# EAGLE board PCB_Niculae_Karla (EAGLE 9.7.0)
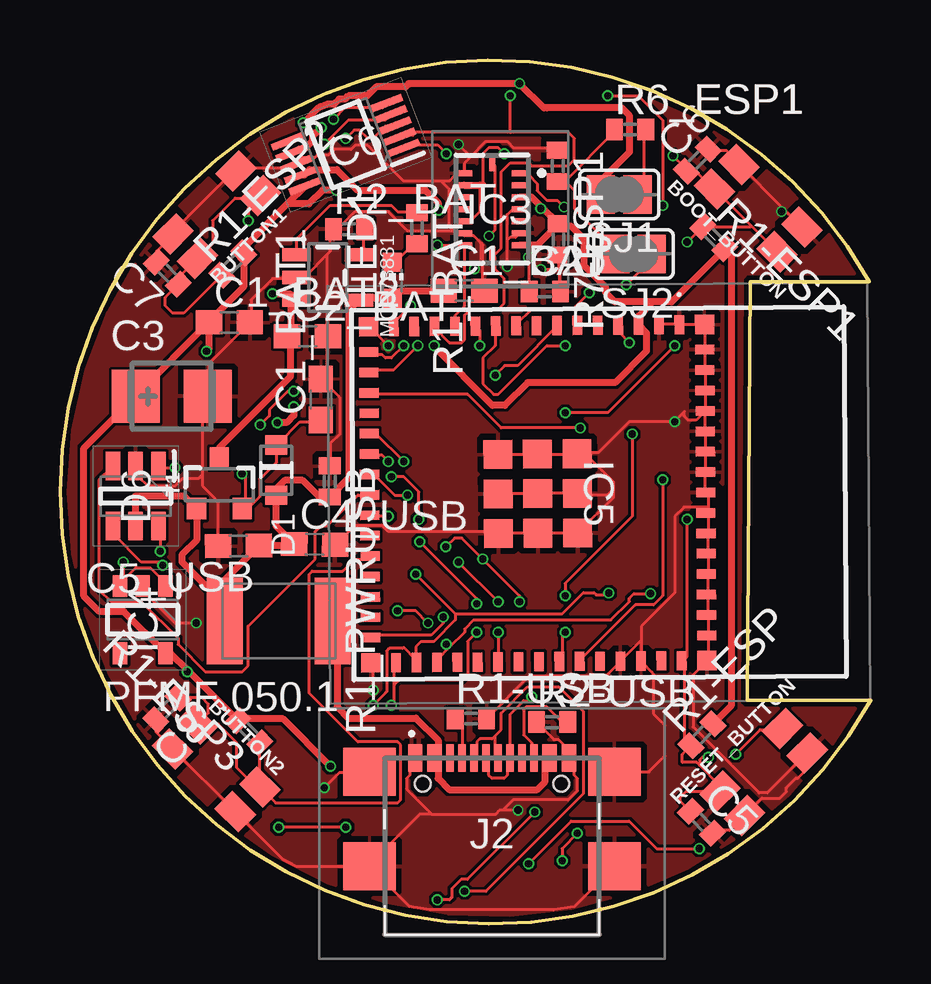
[diagram p0: board, top side]
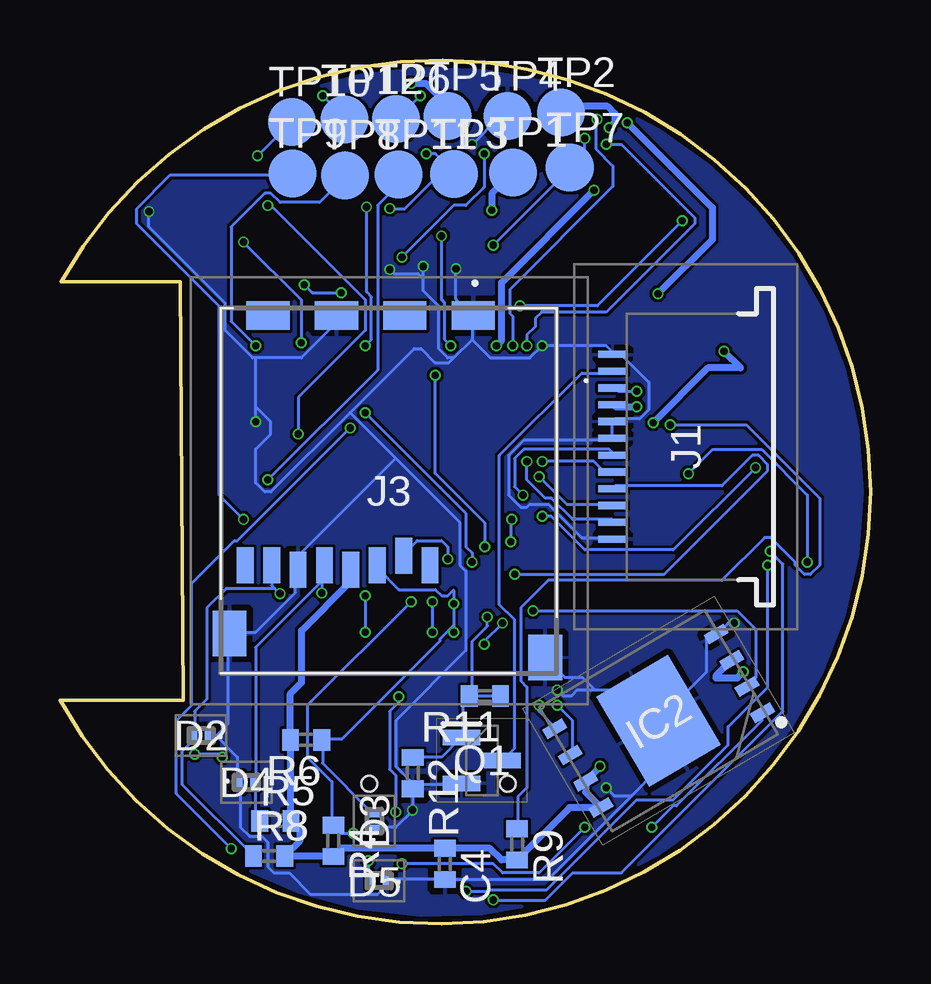
[diagram p1: board, bottom side, seen from below]

Size 33.77 x 36 mm. Coordinates in mm from the lower left corner, seen from the top.
Outline: 0,18 arc151 33.77,9.32 33.65,9.32 28.64,9.32 28.76,26.75 33.73,26.75 arc151 0,18
Copper layers (1*16): Top / Bottom
Stack-up Default Layer Stack: Top User Defined 0.035mm / Dielectric-1 User Defined 1.6mm / Bottom User Defined 0.035mm
Design rules: minimum drill size 0.3mm, minimum copper width 5mil, keepout clearance 0mil, drill distance 6mil, via restrict clearance 0mil, dimension clearance 0.2mm, restrict clearance 0mil, copper clearance wire_polygon to wire_polygon 5mil, copper clearance wire_polygon to pad_smd 5mil, copper clearance wire_polygon to via 5mil, copper clearance pad_smd to pad_smd 5mil, copper clearance pad_smd to via 5mil, copper clearance via to via 5mil, copper clearance smd to pad (same net) 5mil, copper clearance smd to via (same net) 5mil, copper clearance smd to smd (same net) 5mil

## Footprints (pad centres in the part's own frame; a part is rotated, then mirrored left to right if it is on the bottom)
BUTTON = smd 1.4 x 1.05: 1GND -1.85,-0.725; 2GND 1.85,-0.725; 3BUTTON 1.85,0.725; 4BUTTON -1.85,0.725
EAGLE-LTSPICE_C0402 = smd 0.7 x 0.9: 1 -0.65,0; 2 0.65,0
RCL_C0603 = smd 1.1 x 1: 1 -0.85,0; 2 0.85,0
CT3528 = smd 2 x 2.2: + -1.5,0; - 1.5,0
AVX---SD0805S020S1R0_AVX_SD0805S020S1R0_0 = smd 0.8 x 0.9: 1 -1.05,0; 2 1.05,0
PESD5V0S1BL315 = smd 0.4 x 0.7: 1 -0.35,0; 2 0.35,0
SOT95P280X145-6N = smd 1.2 x 0.6: 1 -1.25,0.95; 2 -1.25,0; 3 -1.25,-0.95; 4 1.25,-0.95; 5 1.25,0; 6 1.25,0.95
SON127P800X600X80-9N = smd 0.95 x 0.45: 1 -3.9,1.905; 2 -3.9,0.635; 3 -3.9,-0.635; 4 -3.9,-1.905; 5 3.9,-1.905; 6 3.9,-0.635; 7 3.9,0.635; 8 3.9,1.905 | smd 3.45 x 4.35: 9 0,0
BMI085 = smd 0.675 x 0.25: 1 1.165,1.5; 2 1.165,1; 3 1.165,0.5; 4 1.165,0; 5 1.165,-0.5; 6 1.165,-1; 7 1.165,-1.5; 9 -1.165,-1.5; 10 -1.165,-1; 11 -1.165,-0.5; 12 -1.165,0; 13 -1.165,0.5; 14 -1.165,1; 15 -1.165,1.5 | smd 0.25 x 0.675: 8 0,-1.915; 16 0,1.915
SOT95P280X120-5N = smd 0.9 x 0.6: 1 -1.4,0.95; 2 -1.4,0; 3 -1.4,-0.95; 4 1.4,-0.95; 5 1.4,0.95
ESP32S3MINI1N8 = smd 0.8 x 0.4: 1 -7,5.95; 2 -7,5.1; 3 -7,4.25; 4 -7,3.4; 5 -7,2.55; 6 -7,1.7; 7 -7,0.85; 8 -7,0; 9 -7,-0.85; 10 -7,-1.7; 11 -7,-2.55; 12 -7,-3.4; 13 -7,-4.25; 14 -7,-5.1; 15 -7,-5.95; 31 7,-5.95; 32 7,-5.1; 33 7,-4.25; 34 7,-3.4; 35 7,-2.55; 36 7,-1.7; 37 7,-0.85; 38 7,0; 39 7,0.85; 40 7,1.7; 41 7,2.55; 42 7,3.4; 43 7,4.25; 44 7,5.1; 45 7,5.95 | smd 0.4 x 0.8: 16 -5.95,-7; 17 -5.1,-7; 18 -4.25,-7; 19 -3.4,-7; 20 -2.55,-7; 21 -1.7,-7; 22 -0.85,-7; 23 0,-7; 24 0.85,-7; 25 1.7,-7; 26 2.55,-7; 27 3.4,-7; 28 4.25,-7; 29 5.1,-7; 30 5.95,-7; 46 5.95,7; 47 5.1,7; 48 4.25,7; 49 3.4,7; 50 2.55,7; 51 1.7,7; 52 0.85,7; 53 0,7; 54 -0.85,7; 55 -1.7,7; 56 -2.55,7; 57 -3.4,7; 58 -4.25,7; 59 -5.1,7; 60 -5.95,7 | smd 1.2 x 1.2: 61 0,0; 66 -1.65,1.65; 67 -1.65,0; 68 -1.65,-1.65; 69 0,-1.65; 70 1.65,-1.65; 71 1.65,0; 72 1.65,1.65; 73 0,1.65 | smd 0.8 x 0.8: 62 -7,7; 63 -7,-7; 64 7,-7; 65 7,7
SOP50P490X110-10N = smd 1.4 x 0.3: 1 -2.2,1; 2 -2.2,0.5; 3 -2.2,0; 4 -2.2,-0.5; 5 -2.2,-1; 6 2.2,-1; 7 2.2,-0.5; 8 2.2,0; 9 2.2,0.5; 10 2.2,1
PCA6LA12HL3TR = smd 0.3 x 1.2: 1 -3.85,-3.65; 2 -3.15,-3.65; 3 -2.45,-3.65; 4 -1.75,-3.65; 5 -1.05,-3.65; 6 -0.35,-3.65; 7 0.35,-3.65; 8 1.05,-3.65; 9 1.75,-3.65; 10 2.45,-3.65; 11 3.15,-3.65; 12 3.85,-3.65
USB4110GFA = smd 0.3 x 1.15: A1 -3.35,3.678; A4 -2.55,3.678; A5 -1.25,3.678; A6 -0.25,3.678; A7 0.25,3.678; A8 1.25,3.678; A9 2.55,3.678; A12 3.35,3.678; B1 3.05,3.678; B4 2.25,3.678; B5 1.75,3.678; B6 0.75,3.678; B7 -0.75,3.678; B8 -1.75,3.678; B9 -2.25,3.678; B12 -3.05,3.678 | smd 2.18 x 2: MP1 -5.11,-0.827; MP2 5.11,-0.827; MP3 -5.11,3.103; MP4 5.11,3.103 | hole 0.65: -2.89,2.603; 2.89,2.603
112ATAARR03ATTEND = smd 1.8 x 1.2: G1 10.6,10.4; G2 4.9,10.4; S1 7.75,10.4; S2 2.05,10.4 | smd 1.4 x 1.9: G3 13.6,-3.85; G4 0.45,-2.85 | smd 0.7 x 1.5: P1 8.8,0; P2 7.7,0.4; P3 6.6,0; P4 5.5,-0.2; P5 4.4,0; P6 3.3,-0.2; P7 2.2,0; P8 1.1,0
ADAFRUIT_CHIP-LED0603 = smd 0.8 x 0.8: A 0,-0.75; C 0,0.75
SPARKFUN-IC-POWER_SOT23-5 = smd 0.55 x 1.2: 1 -0.95,-1.3; 2 0,-1.3; 3 0.95,-1.3; 4 0.95,1.3; 5 -0.95,1.3
VARISTOR_CT/CN1812 = smd 1.5 x 3.6: 1 -2.25,0; 2 2.25,0
SOT96P240X120-3N = smd 1.55 x 0.65: 1 -0.85,0.96; 2 -0.85,-0.96; 3 0.85,0
EAGLE-LTSPICE_R0402 = smd 0.7 x 0.9: 1 -0.65,0; 2 0.65,0
SJ = smd 1.168 x 1.6: 1 -0.762,0; 2 0.762,0
SPARKFUN-DISCRETESEMI_SOT23-3 = smd 0.8 x 0.9: 1 -0.95,-1; 2 0.95,-1; 3 0,1.1
TP20R = smd 2 x 2: TP 0,0

## Placement (x,y rotation side)
BOOT_BUTTON  [BUTTON]  29.09,29.83 135 top
BUTTON1  [BUTTON]  6.53,29.55 225 top
BUTTON2  [BUTTON]  6.51,6.5 315 top
C1  1uF  [EAGLE-LTSPICE_C0402]  20.77,28.52 270 top
C1_BAT  4.7uF  [RCL_C0603]  16.84,26.38 0 top
C1_BAT1  4.7uF 0603  [RCL_C0603]  10.87,21.85 90 top
C1_BAT2  4.7uF 0603  [RCL_C0603]  7.05,25.06 0 top
C2  1uF  [EAGLE-LTSPICE_C0402]  20.2,26.36 0 top
C2_BAT  4.7uF  [RCL_C0603]  10.32,24.48 0 top
C3  100uF TANT C  [CT3528]  4.66,21.99 0 top
C4  100nF  [EAGLE-LTSPICE_C0402]  17.74,2.5 270 bottom
C4_USB  100nF  [RCL_C0603]  10.61,15.81 359.2 top
C5  1uF  [EAGLE-LTSPICE_C0402]  26.73,4.24 315 top
C5_USB  4.7uF 0603  [RCL_C0603]  7.44,15.75 180.7 top
C6  100nF  [EAGLE-LTSPICE_C0402]  26.55,31.83 45 top
C7  100nF  [EAGLE-LTSPICE_C0402]  4.47,27.11 135 top
C8  100nF  [EAGLE-LTSPICE_C0402]  4.46,8.96 225 top
D1  AVX---SD0805S020S1R0_AVX_SD0805S020S1R0AVX_SD0805S020S1R0_0_0  [AVX---SD0805S020S1R0_AVX_SD0805S020S1R0_0]  9.01,18.91 270 top
D2  PESD3V3S1BLYL  [PESD5V0S1BL315]  27.89,7.85 180 bottom
D3  PESD3V3S1BLYL  [PESD5V0S1BL315]  20.67,4.29 90 bottom
D4  PESD3V3S1BLYL  [PESD5V0S1BL315]  26,5.9 0 bottom
D5  PESD3V3S1BLYL  [PESD5V0S1BL315]  20.48,1.8 180 bottom
D6  USBLC6-2SC6Y  [SOT95P280X145-6N]  3.15,17.83 270 top
IC2  W25Q256JVEIQ  [SON127P800X600X80-9N]  8.83,8.47 210.4 bottom
IC3  BMI085  [BMI085]  18,29.79 0 top
IC4  XC6220A331MR-G  [SOT95P280X120-5N]  3.45,12.68 270 top
IC5  ESP32-S3-MINI-1-N8  [ESP32S3MINI1N8]  19.9,17.93 270.4 top
IC6  DRV2605LDGST  [SOP50P490X110-10N]  11.9,32.47 201.2 top
J1  PCA-6-LA-12-HL-3-T_R  [PCA6LA12HL3TR]  7.1,19.88 270 bottom
J2  USB4110-GF-A  [USB4110GFA]  18,3.23 0 top
J3  112A-TAAR-R03_ATTEND  [112ATAARR03ATTEND]  27.15,14.95 0 bottom
LED1  [ADAFRUIT_CHIP-LED0603]  13.84,26.82 0 top
MCP73831  SPARKFUN-IC-POWER_MCP73831  [SPARKFUN-IC-POWER_SOT23-5]  11.16,26.94 270 top
PFMF.050.1  500mA  [VARISTOR_CT/CN1812]  9.11,12.62 180 top
Q1  2N7002  [SOT96P240X120-3N]  16.19,6.82 0 bottom
R1-ESP  10K  [EAGLE-LTSPICE_R0402]  26.75,7.88 45 top
R1-ESP1  10K  [EAGLE-LTSPICE_R0402]  27.25,28.6 315 top
R1-ESP2  10K  [EAGLE-LTSPICE_R0402]  7.2,27.5 45 top
R1-ESP3  10K  [EAGLE-LTSPICE_R0402]  7.87,8.01 135 top
R1-USB  5K1  [EAGLE-LTSPICE_R0402]  17.12,8.56 0 top
R1_BAT  200  [EAGLE-LTSPICE_R0402]  14.87,28.99 270 top
R1_PWRUSB  100k  [EAGLE-LTSPICE_R0402]  11.24,18.44 270 top
R2-USB  5K1  [EAGLE-LTSPICE_R0402]  20.5,8.41 0 top
R2_BAT  2K  [EAGLE-LTSPICE_R0402]  12.04,28.95 0 top
R4  10K  [EAGLE-LTSPICE_R0402]  22.38,3.46 270 bottom
R5  10K  [EAGLE-LTSPICE_R0402]  24.79,4.3 0 bottom
R6  10K  [EAGLE-LTSPICE_R0402]  23.52,7.67 180 bottom
R6_ESP1  100K  [EAGLE-LTSPICE_R0402]  23.75,33.1 0 top
R7-ESP1  100K  [EAGLE-LTSPICE_R0402]  20.74,31.58 270 top
R8  10K  [EAGLE-LTSPICE_R0402]  25.06,2.84 0 bottom
R9  22  [EAGLE-LTSPICE_R0402]  14.72,3.32 270 bottom
R11  10K  [EAGLE-LTSPICE_R0402]  16.07,9.5 180 bottom
R12  10K  [EAGLE-LTSPICE_R0402]  19.07,6.29 270 bottom
RESET_BUTTON  [BUTTON]  29.32,6.33 45 top
SJ1  [SJ]  23.3,30.39 180 top
SJ2  [SJ]  23.9,27.92 180 top
T1  20V/4.2A/52mΩ/1.4W  [SPARKFUN-DISCRETESEMI_SOT23-3]  6.64,18.3 0 top
TP1  TPTP20R  [TP20R]  14.9,31.32 0 bottom
TP2  TPTP20R  [TP20R]  12.89,33.8 0 bottom
TP3  TPTP20R  [TP20R]  17.35,31.24 0 bottom
TP4  TPTP20R  [TP20R]  15.12,33.66 0 bottom
TP5  TPTP20R  [TP20R]  17.62,33.66 0 bottom
TP6  TPTP20R  [TP20R]  19.77,33.54 0 bottom
TP7  TPTP20R  [TP20R]  12.53,31.51 0 bottom
TP8  TPTP20R  [TP20R]  21.9,31.19 0 bottom
TP9  TPTP20R  [TP20R]  24.09,31.28 0 bottom
TP10  TPTP20R  [TP20R]  24.1,33.42 0 bottom
TP11  TPTP20R  [TP20R]  19.67,31.23 0 bottom
TP12  TPTP20R  [TP20R]  21.91,33.51 0 bottom

## Library data of the parts
BOOT_BUTTON BUTTON1 BUTTON2 LED1 PFMF.050.1 RESET_BUTTON SJ1 SJ2 TP1-TP12 = Hector_Watch
C1 C2 C4-C8 = Hector_Watch; SPICEMODEL: NONE; SPICEPREFIX: C
C1_BAT C1_BAT1 C1_BAT2 C2_BAT C3 C4_USB C5_USB = Hector_Watch; SPICEPREFIX: C
D1 = Hector_Watch; CENTROID_NOT_SPECIFIED: No; DATASHEET: http://datasheets.avx.com/schottky.pdf; DIGIKEY_DESCRIPTION: DIODE SCHOTTKY 20V 1A 0805; DIGIKEY_PART_NUMBER: 478-7800-1-ND; LEAD_FREE: yes; MF: AVX; MOUSER_PART_NUMBER: 581-SD0805S020S1R0; MPN: SD0805S020S1R0; PACKAGE: 0805 (2012 metric); PREFIX: D; ROHS: yes; TEMPERATURE_RANGE_HIGH: +125°C; TEMPERATURE_RANGE_LOW: -55°C
D2-D5 = Hector_Watch; ARROW_PART_NUMBER: PESD3V3S1BLYL; ARROW_PRICE-STOCK: https://www.arrow.com/en/products/pesd3v3s1blyl/nexperia?region=nac; DESCRIPTION: PESD3V3S1BL - Low capacitance bidirectional ESD protection diode; HEIGHT: 0mm; MANUFACTURER_NAME: Nexperia; MANUFACTURER_PART_NUMBER: PESD3V3S1BLYL; MOUSER_PART_NUMBER: 771-PESD3V3S1BLYL; MOUSER_PRICE-STOCK: https://www.mouser.co.uk/ProductDetail/Nexperia/PESD3V3S1BLYL?qs=vLWxofP3U2zWoKHYJMVoKQ%3D%3D
D6 = Hector_Watch; ARROW_PART_NUMBER: USBLC6-2SC6Y; ARROW_PRICE-STOCK: https://www.arrow.com/en/products/usblc6-2sc6y/stmicroelectronics?region=nac; DESCRIPTION: Low Cap. ESD Protection Auto SOT-23-6 STMicroelectronics USBLC6-2SC6Y, Dual Uni-Directional TVS Diode Array, 6-Pin SOT-23; HEIGHT: 1.45mm; MANUFACTURER_NAME: STMicroelectronics; MANUFACTURER_PART_NUMBER: USBLC6-2SC6Y; MOUSER_PART_NUMBER: 511-USBLC6-2SC6Y; MOUSER_PRICE-STOCK: https://www.mouser.co.uk/ProductDetail/STMicroelectronics/USBLC6-2SC6Y?qs=gNDSiZmRJS%2FOgDexvXkdow%3D%3D
IC2 = Hector_Watch; ARROW_PART_NUMBER: W25Q256JVEIQ; ARROW_PRICE-STOCK: https://www.arrow.com/en/products/w25q256jveiq/winbond-electronics?region=nac; DESCRIPTION: 256M-bit Serial Flash Memory with uniform 4KB sectors and Dual/Quad SPI; HEIGHT: 0.8mm; MANUFACTURER_NAME: Winbond; MANUFACTURER_PART_NUMBER: W25Q256JVEIQ; MOUSER_PART_NUMBER: 454-W25Q256JVEIQ; MOUSER_PRICE-STOCK: https://www.mouser.co.uk/ProductDetail/Winbond/W25Q256JVEIQ?qs=qSfuJ%252Bfl%2Fd4o%2FNFUf7yCgA%3D%3D
IC3 = Hector_Watch; ARROW_PART_NUMBER: BMI085; ARROW_PRICE-STOCK: https://www.arrow.com/en/products/bmi085/bosch; DESCRIPTION: IMUs - Inertial Measurement Units High-performance IMU BMI085 for virtual and augmented reality applications; HEIGHT: 1mm; MANUFACTURER_NAME: BOSCH; MANUFACTURER_PART_NUMBER: BMI085; MOUSER_PART_NUMBER: 262-BMI085; MOUSER_PRICE-STOCK: https://www.mouser.co.uk/ProductDetail/Bosch-Sensortec/BMI085?qs=y6ZabgHbY%252ByGCM8LfWZyqA%3D%3D
IC4 = Hector_Watch; DESCRIPTION: LDO Voltage Regulators; HEIGHT: 1.2mm; MANUFACTURER_NAME: Torex; MANUFACTURER_PART_NUMBER: XC6220A331MR-G; MOUSER_PART_NUMBER: 865-XC6220A331MR-G; MOUSER_PRICE-STOCK: https://www.mouser.co.uk/ProductDetail/Torex-Semiconductor/XC6220A331MR-G?qs=AsjdqWjXhJ8ZSWznL1J0gg%3D%3D
IC5 = Hector_Watch; DESCRIPTION: WiFi Development Tools - 802.11 [Engineering Samples] SMD Module, ESP32-S3FN8, 8 MB SPI Flash, PCB Antenna; HEIGHT: 2.55mm; MANUFACTURER_NAME: Espressif Systems; MANUFACTURER_PART_NUMBER: ESP32-S3-MINI-1-N8; MOUSER_PART_NUMBER: 356-ESP32-S3-MINI1N8; MOUSER_PRICE-STOCK: https://www.mouser.co.uk/ProductDetail/Espressif-Systems/ESP32-S3-MINI-1-N8?qs=XAiT9M5g4x82rl6F%2FIYUQg%3D%3D
IC6 = Hector_Watch; ARROW_PART_NUMBER: DRV2605LDGST; ARROW_PRICE-STOCK: https://www.arrow.com/en/products/drv2605ldgst/texas-instruments?region=nac; DESCRIPTION: ERM & LRA Device Haptic Driver 2-5V BGA9 Texas Instruments DRV2605LDGST Piezo Haptic Motor Driver IC, 5 V, 10-Pin VSSOP; HEIGHT: 1.1mm; MANUFACTURER_NAME: Texas Instruments; MANUFACTURER_PART_NUMBER: DRV2605LDGST; MOUSER_PART_NUMBER: 595-DRV2605LDGST; MOUSER_PRICE-STOCK: https://www.mouser.co.uk/ProductDetail/Texas-Instruments/DRV2605LDGST?qs=asCBFxFfL1TjvcNdZsR2BA%3D%3D
J1 = Hector_Watch; DESCRIPTION: CONN FFC BOTTOM 12POS 0.5MM R/A; HEIGHT: 2.808mm; MANUFACTURER_NAME: Adam Tech; MANUFACTURER_PART_NUMBER: PCA-6-LA-12-HL-3-T/R
J2 = Hector_Watch; DESCRIPTION: CONN USB 2.0 TYPE-C R/A SMT; HEIGHT: 3.26mm; MANUFACTURER_NAME: GCT (GLOBAL CONNECTOR TECHNOLOGY); MANUFACTURER_PART_NUMBER: USB4110-GF-A; MOUSER_PART_NUMBER: 640-USB4110-GF-A; MOUSER_PRICE-STOCK: https://www.mouser.co.uk/ProductDetail/GCT/USB4110-GF-A?qs=KUoIvG%2F9IlYiZvIXQjyJeA%3D%3D
J3 = Hector_Watch; DESCRIPTION: Micro SD Card Socket, Push-Push Type, Top Mount, SMT, H=1.83mm, 10u; HEIGHT: 1.9mm; MANUFACTURER_NAME: ATTEND; MANUFACTURER_PART_NUMBER: 112A-TAAR-R03 ATTEND
MCP73831 = Hector_Watch; PROD_ID: IC-09995
Q1 = Hector_Watch; ARROW_PART_NUMBER: 2N7002; ARROW_PRICE-STOCK: https://www.arrow.com/en/products/2n7002/on-semiconductor?region=europe; DESCRIPTION: N-channel MOSFET,2N7002 0.115A 60V; HEIGHT: 1.2mm; MANUFACTURER_NAME: onsemi; MANUFACTURER_PART_NUMBER: 2N7002; MOUSER_PART_NUMBER: 512-2N7002; MOUSER_PRICE-STOCK: https://www.mouser.co.uk/ProductDetail/onsemi-Fairchild/2N7002?qs=0dwsXDNhqlz66WJJhrTFjQ%3D%3D
R1-ESP R1-ESP1-R1-ESP3 R1-USB R1_BAT R1_PWRUSB R2-USB R2_BAT R4-R6 R6_ESP1 R7-ESP1 R8 R9 R11 R12 = Hector_Watch; SPICEMODEL: NONE; SPICEPREFIX: R
T1 = Hector_Watch; PROD_ID: TRANS-14715

## Nets
3V3: C1.1 C1_BAT2.1 C3.+ C4.1 IC2.3 IC2.7 IC2.8 IC3.3 IC3.7 IC3.11 IC3.14 IC4.5 IC5.3 IC6.10 J1.4 J3.P4 R1-ESP1.2 R1-ESP2.2 R1-ESP3.2 R1-ESP.2 R4.2 R5.2 R6.2 R8.2 R9.2 TP3.TP
ADC_BAT: IC5.9 SJ2.1
BOOT: BOOT_BUTTON.3BUTTON BOOT_BUTTON.4BUTTON C6.1 IC5.4 R1-ESP1.1 TP10.TP
BUTTON1: BUTTON1.3BUTTON BUTTON1.4BUTTON C7.1 IC5.15 R1-ESP2.1
BUTTON2: BUTTON2.3BUTTON BUTTON2.4BUTTON C8.1 IC5.26 R1-ESP3.1
D+: D6.1 IC5.24
D-: D6.3 IC5.23
DISP_RST: IC5.20 J1.11
DN: D6.4 J2.A7 J2.B7
DP: D6.6 J2.A6 J2.B6
EN_DRV: IC5.17 IC6.5
GND: BOOT_BUTTON.1GND BOOT_BUTTON.2GND BUTTON1.1GND BUTTON1.2GND BUTTON2.1GND BUTTON2.2GND C1.2 C1_BAT1.2 C1_BAT2.2 C1_BAT.2 C2.2 C2_BAT.2 C3.- C4.2 C4_USB.2 C5.2 C5_USB.2 C6.2 C7.2 C8.2 D2.1 D3.1 D4.1 D5.1 D6.2 IC2.4 IC2.9 IC3.4 IC3.6 IC3.10 IC3.15 IC4.2 IC5.1 IC5.2 IC5.42 IC5.43 IC5.46 IC5.47 IC5.48 IC5.49 IC5.50 IC5.51 IC5.52 IC5.53 IC5.54 IC5.55 IC5.56 IC5.57 IC5.58 IC5.59 IC5.60 IC5.61 IC5.62 IC5.63 IC5.64 IC5.65 IC5.66 IC5.67 IC5.68 IC5.69 IC5.70 IC5.71 IC5.72 IC5.73 IC6.8 J1.1 J1.5 J1.6 J1.12 J2.A1 J2.A12 J2.B1 J2.B12 J2.MP1 J2.MP2 J2.MP3 J2.MP4 J3.G1 J3.G2 J3.G3 J3.G4 J3.P6 MCP73831.2 Q1.2 R1-USB.2 R1_PWRUSB.1 R2-USB.1 R2_BAT.1 R7-ESP1.1 R12.2 RESET_BUTTON.1GND RESET_BUTTON.2GND TP4.TP
IMU_INT1: IC3.16 IC5.11
IMU_INT2: IC3.1 IC5.10
IN_DRV: IC5.16 IC6.4
LEDA: J1.3 R9.1
LEDK: J1.2 Q1.3
MISO: D2.2 IC2.2 IC5.33 J3.P7 R8.1
MOSI: D3.2 IC2.5 IC5.31 J1.10 J3.P3 R6.1
N$1: J2.B5 R2-USB.2
N$2: R6_ESP1.1 R7-ESP1.2 SJ2.2
N$3: C1_BAT1.1 D1.1 IC4.1 IC4.3 T1.2
N$4: J2.A5 R1-USB.1
N$5: R6_ESP1.2 SJ1.1
N$7: C2.1 IC6.1
N$8: MCP73831.1 R1_BAT.1
N$13: MCP73831.5 R2_BAT.2
N$18: LED1.C R1_BAT.2
PIN_LED: IC5.30 Q1.1 R11.1 R11.2 R12.1
PPG_INT: IC5.36 TP8.TP
RESET: C5.1 IC5.45 R1-ESP.1 RESET_BUTTON.3BUTTON RESET_BUTTON.4BUTTON TP9.TP
RX: IC5.40 TP11.TP
SCK: D4.2 IC2.6 IC5.32 J1.9 J3.P5 R5.1
SCL: IC3.8 IC5.13 IC6.2 TP6.TP
SDA: IC3.9 IC5.12 IC6.3 TP7.TP
SS_FLASH: IC2.1 IC5.18
SS_SD: D5.2 IC5.7 J3.P2 R4.1
SS_TFT: IC5.21 J1.8
TFT_DC: IC5.22 J1.7
TX: IC5.39 TP12.TP
VBAT: C2_BAT.1 MCP73831.3 SJ1.2 T1.3 TP5.TP
VBUS: C1_BAT.1 C4_USB.1 C5_USB.1 D1.2 D6.5 LED1.A MCP73831.4 PFMF.050.1.2 R1_PWRUSB.2 T1.1
VIBE_OUT+: IC6.9 TP1.TP
VIBE_OUT-: IC6.7 TP2.TP
VUSB: J2.A4 J2.A9 J2.B4 J2.B9 PFMF.050.1.1

## Tracks (layer width: path | path; a pad name or v marks a point on that pad's centre or on a via)
3V3  (via drill 0.3)
  Top 0.127: 17.49,30.79 17.49,29.68 17.11,29.3 16.86,29.3 IC3.11 | 17.62,30.79 17.62,32.1 17.87,32.35 18.25,32.35 v18.51,32.1 | v20.03,29.81 20.08,29.86 | v5.3,10.51 5.34,10.54
  Top 0.3: R1-ESP3.2 7.34,8.55 | 7.34,8.55 5.34,10.54 4.6,11.28 IC4.5 2.67,13.01 1.65,13.01 0.99,13.67 0.99,19.82 C3.+ 3.16,22.01 C1_BAT2.1 | IC3.3 19.66,30.29 20.08,29.86 C1.1 20.67,29.07 | R1-ESP.2 27.96,9.09 27.96,27.89 R1-ESP1.2 25.48,25.92 24.69,25.92 | IC3.14 17.49,30.79 17.62,30.79 | IC3.7 19.89,28.29 20.67,29.07 | C1_BAT2.1 6.2,25.1 7.65,26.55 R1-ESP2.2 7.65,28.18 9.47,30 | v11.27,6.57 9.29,8.55 7.34,8.55 | C1_BAT2.1 6.2,23.96 v6.11,23.87 | v9.74,21.56 9.74,21.19 9.44,20.89 v9.06,20.89 | 24.69,25.92 24.11,25.33 IC5.3 24.44,24.63 24.44,23.87 23.13,22.56 19.48,22.56 18.54,21.61 18.02,21.61 15.59,24.04 v15.59,24.1 | 24.69,25.92 23.12,25.92 22.73,26.31 22.73,26.53 21.85,27.42 21.85,28.53 21.31,29.07 20.67,29.07 | IC6.10 9.47,30 | v11.52,30.57 10.94,30.57 10.37,30 9.47,30
  Bottom 0.127: v18.51,32.1 18.13,32.1 17.62,31.59 | 17.62,31.59 17.36,31.33 TP3.TP 17.62,31.59 | 17.62,31.59 19.4,29.81 v20.03,29.81 | J1.4 10.63,21.56
  Bottom 0.3: J3.P4 21.65,14.27 23.71,12.22 23.71,10.06 24.17,9.6 R6.2 24.17,4.32 R5.2 23.79,3.95 23.79,3.45 R8.2 24.39,2.81 R4.2 22.05,3.15 C4.1 15.86,3.15 15.37,2.67 R9.2 12.54,4.85 IC2.8 11.87,5.49 IC2.7 11.27,6.55 v11.27,6.57 | IC2.3 6.44,10.34 6.44,10.26 5.55,10.26 v5.3,10.51 | 10.63,21.56 v9.74,21.56 | v9.06,20.89 6.78,23.17 5.41,23.17 v6.11,23.87 | v15.59,24.1 15.37,24.31 15.37,26.72 v11.52,30.57
ADC_BAT  (via drill 0.3)
  Top 0.127: v22.05,26.3 21.37,25.62 19.65,25.62 19.02,24.98 IC5.9 | v23.59,26.64 24.78,27.83 SJ2.1
  Bottom 0.127: v22.05,26.3 23.25,26.3 v23.59,26.64
BOOT  (via drill 0.3)
  Top 0.127: v23.71,24.22 23.33,24.6 23.33,24.86 IC5.4 | v26.13,28.41 26.76,29.05 R1-ESP1.1 28.78,29.06 28.78,29.11 | 28.78,29.11 BOOT_BUTTON.3BUTTON 27.14,30.7 26.51,31.33 26.13,31.33 C6.1 26,31.46 26,31.55 v25.54,32.01 | 28.78,29.11 BOOT_BUTTON.4BUTTON
  Bottom 0.127: v23.71,24.22 23.71,26 v26.13,28.41 | TP10.TP 24.13,33.42 v25.54,32.01
BUTTON1  (via drill 0.3)
  Top 0.127: BUTTON1.3BUTTON 4.93,26.93 C7.1 4.39,26.11 4.39,25.75 4.69,25.45 5.15,25.45 R1-ESP2.1 | BUTTON1.3BUTTON 6.06,27.78 6.19,27.65 BUTTON1.3BUTTON | v7.84,29.3 7.84,29.81 8.27,30.24 | 8.27,30.24 8.35,30.32 BUTTON1.4BUTTON | 8.27,30.24 7.29,30.24 6.36,29.3 6.36,28.35 BUTTON1.3BUTTON | IC5.15 13.91,25.06 v14.61,25.76
  Bottom 0.127: v14.61,25.76 11.39,25.76 v7.84,29.3
BUTTON2
  Top 0.127: 8.35,5.68 8.98,5.05 14.06,5.05 14.19,5.17 14.19,7.46 14.06,7.59 12.41,7.59 10.38,9.62 10.38,14.57 10.51,14.7 11.78,14.7 12.29,15.21 12.92,15.21 IC5.26 | 8.35,5.68 BUTTON2.3BUTTON R1-ESP3.1 | 8.35,5.68 8.19,5.68 7.35,6.52 7.35,7.57 6.59,8.32 BUTTON2.4BUTTON 6.19,8.8 6.19,9.16 5.93,9.42 C8.1
D+  (via drill 0.3)
  Top 0.127: v13.68,16.98 12.92,16.98 IC5.24 | v4.79,19.02 4.16,19.02 D6.1
  Bottom 0.127: v13.68,16.98 13.3,16.98 11.9,15.59 8.22,15.59 v4.79,19.02
D-
  Top 0.127: IC5.23 12.79,17.87 12.41,17.87 11.14,16.6 10.89,16.6 10.63,16.35 10.63,15.21 7.84,12.41 7.84,10.76 7.59,10.51 6.06,10.51 4.92,11.65 4.92,11.9 3.39,13.43 2.12,13.43 1.62,13.94 1.62,18.51 2.12,19.02 D6.3
DISP_RST  (via drill 0.3)
  Top 0.127: v14.32,19.27 13.17,20.41 12.92,20.41 IC5.20
  Bottom 0.127: v14.32,19.27 14.32,18.51 13.55,17.75 13.3,17.75 12.41,16.86 10.76,16.86 J1.11
DN  (via drill 0.3)
  Top 0.127: 18.13,7.84 18.13,6.95 J2.A7 | J2.B7 17.36,6.95 17.36,7.59 17.49,7.71 18,7.71 18.13,7.84 | v4.28,14.95 4.16,15.08 3.39,15.08 2.25,16.22 2.25,16.48 D6.4 | v16.86,1.36 17.75,1.36 21.81,5.43 21.81,8.86 20.78,9.88 19.48,9.88 18.38,8.78 18.38,8.09 18.13,7.84
  Bottom 0.127: v4.28,14.95 4.28,9.87 5.94,8.22 5.94,7.46 8.22,5.17 9.74,5.17 13.5,1.42 15.89,1.42 15.94,1.36 v16.86,1.36
DP  (via drill 0.3)
  Top 0.127: J2.A6 17.87,6.82 17.87,6.19 18,6.06 18.51,6.06 18.64,6.19 18.64,6.82 J2.B6 18.76,6.95 18.76,8.74 19.32,9.3 19.49,9.3 v19.65,9.47 | v19.78,4.66 16.97,1.86 16.71,1.86 16.33,1.48 16.33,1.1 16.23,1 v15.71,1 | D6.6 4.18,16.5 v4.18,15.52
  Bottom 0.127: v4.18,15.52 3.65,14.99 3.65,8.86 10.38,2.12 12.41,2.12 13.55,0.98 15.69,0.98 v15.71,1 | v19.78,4.66 19.78,6.19 20.03,6.44 20.03,8.86 19.65,9.24 v19.65,9.47
EN_DRV  (via drill 0.3)
  Top 0.127: v14.91,24.1 13.89,23.08 12.92,23.08 IC5.17 | IC6.5 13.55,34.13 13.43,34 11.87,34 v11.4,33.53
  Bottom 0.127: v14.91,24.1 14.91,25.33 15.03,25.44 15.03,26.44 10.73,30.73 10.73,31.58 11.45,32.3 11.45,33.48 v11.4,33.53
GND  (via drill 0.3)
  Top 0.127: RESET_BUTTON.2GND 31,6.99 | 31,6.99 30.8,6.79 | 12.95,10.73 IC5.64 13.05,10.76 v13.05,9.74 | BUTTON1.1GND 7.37,31.41 | IC5.68 19.88,19.57 IC5.67 21.53,19.58 IC5.66 | 21.54,17.95 IC5.73 | IC5.73 19.92,17.94 IC5.61 18.27,17.93 IC5.69 | IC5.73 21.57,17.93 21.57,17.87 22.8,17.87 23.04,18.12 | BOOT_BUTTON.1GND 30.1,29.84 | 30.1,29.84 BOOT_BUTTON.2GND 28.29,31.72 27.78,32.22 27.02,32.22 C6.2 | C4_USB.2 11.52,15.84 12.29,16.6 13.43,16.6 13.68,16.35 18.25,16.35 IC5.70 IC5.71 21.55,16.28 IC5.72 23.04,17.77 23.04,18.12 | C5.2 27.21,3.9 27.91,3.9 28.41,4.41 RESET_BUTTON.1GND | 30.83,6.82 RESET_BUTTON.2GND | 28.54,4.54 RESET_BUTTON.1GND | IC5.2 24.98,24.98 25.75,24.98 IC5.1 25.87,24.98 26.76,24.98 IC5.62 26.89,24.86 26.89,23.97 IC5.60 26.89,23.84 26.89,23.08 IC5.59 26.89,22.95 26.89,22.32 IC5.58 26.89,22.19 26.89,21.43 IC5.57 | 27.02,17.36 27.02,17.87 IC5.53 26.89,18 26.89,18.76 IC5.54 26.89,18.89 26.89,19.65 IC5.55 26.89,19.78 26.89,20.41 IC5.56 26.89,21.3 IC5.57 | 27.02,17.36 27.02,17.24 IC5.52 27.02,17.11 27.02,16.35 IC5.51 27.02,16.22 27.02,15.46 IC5.50 27.02,15.33 27.02,14.7 IC5.49 27.02,14.57 27.02,13.81 IC5.48 27.02,13.68 27.02,12.92 IC5.47 27.02,12.79 27.02,12.03 IC5.46 27.02,11.9 27.02,11.01 IC5.65 26.89,10.89 26.38,10.38 26.38,8.21 29.13,5.46 29.47,5.46 RESET_BUTTON.2GND | IC5.66 21.56,19.65 22.45,19.65 23.71,20.92 v25.62,20.92 25.62,20.95 26.01,21.34 26.01,21.15 26.16,21 26.5,21 IC5.57 | 24.22,11.82 24.22,12.41 25.62,13.81 25.62,16.98 26,17.36 27.02,17.36 | 24.22,11.82 24.22,11.01 IC5.43 24.3,10.86 24.67,10.5 24.67,10.48 24.75,10.4 24.75,8.73 25.21,8.27 25.21,7 24.54,6.33 J2.MP4
  Top 0.127: v5.68,12.54 4.79,12.54 3.52,13.81 3.52,14.06 IC4.2 | C5_USB.2 6.57,15.84 6.57,17.62 5.94,18.25 5.94,18.73 | D6.2 3.27,19.02 3.27,18.63 3.65,18.25 4.8,18.25 5.12,18.57 5.77,18.57 5.94,18.73 | R1_PWRUSB.1 11.27,19.14 11.27,20.03 11.65,20.41 11.65,21.94 10.89,22.7 C1_BAT1.2 10.89,22.83 11.14,23.08 11.14,24.48 C2_BAT.2 11.14,24.6 11.14,27.91 | 10.25,27.02 11.14,27.91 | 11.14,27.91 11.27,28.03 11.27,28.92 R2_BAT.1 11.4,29.05 11.65,29.05 12.29,29.68 13.68,29.68 14.47,28.89 16.38,28.89 | 10.25,27.02 9.87,27.02 MCP73831.2 | MCP73831.2 9.74,26.89 8.86,26.89 7.97,26 7.97,25.11 C1_BAT2.2 7.84,24.98 6.19,23.33 6.19,22.06 C3.- 6.06,21.94 5.94,21.81 5.94,18.73 | 10.25,27.02 MCP73831.2 | C7.2 4.03,28.03 4.66,28.67 BUTTON1.2GND 4.66,28.79 7.21,31.33 BUTTON1.1GND | 17.53,28.38 17.62,28.29 17.62,26.51 C1_BAT.2 | 17.53,28.38 17.24,28.67 16.86,28.67 IC3.10 16.73,28.79 16.48,28.79 16.38,28.89 | 16.38,28.89 16.22,29.05 16.22,30.62 15.89,30.95 | 17.11,31.97 16.86,31.72 16.86,31.33 IC3.15 16.73,31.21 16.48,31.21 16.22,30.95 15.89,30.95 | 17.11,31.97 17.75,32.6 18.64,32.6 18.89,32.35 20.67,32.35 R7-ESP1.1 | 17.11,31.97 v16.6,32.48 | 15.89,30.95 14.32,30.95 12.82,32.46 12.31,32.46 12.13,32.27 11.42,32.27 11.19,32.04 10.72,32.04 10.6,31.92 10.07,31.92 9.87,31.72 9.87,31.69 IC6.8 9.68,31.5 7.46,31.5 BUTTON1.1GND | 4.03,8.47 C8.2 4,8 4.66,7.33 BUTTON2.1GND | 7.21,4.79 BUTTON2.2GND | 4.79,7.2 BUTTON2.1GND | J2.B12 14.82,6.95 14.7,6.95 J2.A1 14.57,6.82 14.57,6.19 14.44,6.06 14.44,5.62 15.48,4.58 | 7.33,4.66 7.33,4.67 | 7.33,4.67 BUTTON2.2GND | v30.06,29.68 30.06,29.81 30.1,29.84
  Top 0.127: v13.68,24.1 12.92,24.86 IC5.63 | 20.79,27.27 20.79,27.78 C1.2 | 20.79,27.27 20.79,26.38 C2.2 | v18.64,27.4 18.64,28.5 | 18.64,28.5 18.64,29.56 18.87,29.79 IC3.4 | v20.03,27.27 20.79,27.27 | RESET_BUTTON.1GND 29.25,5.24 29.98,5.24 30.26,5.52 30.26,5.67 30.67,6.08 30.74,6.08 31,6.34 31,6.99 | 15.48,4.58 14.99,4.58 12.89,2.48 J2.MP1 | 15.48,4.58 18.15,4.58 18.33,4.75 18.46,4.75 | 18.46,4.75 v19.08,4.75 v19.08,4.74 | 18.46,4.75 18.88,5.17 21.18,5.17 21.56,5.55 21.56,6.06 21.43,6.19 21.43,6.82 J2.A12 21.3,6.95 21.18,6.95 J2.B1 21.05,7.4 20.78,7.67 20.59,7.67 R2-USB.1 | 17.53,28.38 17.53,27.55 v17.27,27.3 | IC5.66 21.88,19.59 23.04,18.43 23.04,18.12 | IC3.6 18.98,28.6 18.75,28.6 18.65,28.5 18.64,28.5 | 24.22,11.82 IC5.42 23.35,10.93 22.77,10.34 19.55,10.34 R1-USB.2 | J2.MP2 21.43,0.73 20.56,0.59 15.42,0.59 14.74,0.7 | 14.74,0.7 | 14.74,0.7 14.56,0.73 J2.MP1 | BUTTON2.1GND 7.32,4.67 7.33,4.67 | BUTTON2.2GND 9.27,2.71 9.84,2.4 J2.MP1 | v11.02,5.68 11.65,6.32 12.79,6.32 J2.MP3
  Bottom 0.127: J3.G4 26.5,12.1 | v5.68,12.54 5.94,12.54 6.32,12.16 IC2.4 6.82,12.03 6.82,10.51 7.84,9.49 IC2.9 | 11.47,9.74 8.86,9.74 IC2.9 | J3.G4 26.51,12.16 25.62,12.16 23.97,13.81 23.97,14.7 J3.P6 23.84,14.82 23.84,15.33 19.78,19.4 | 27.27,7.84 26.38,6.95 26.38,5.93 D4.1 26.26,5.81 26.26,4.03 25.87,3.65 25.37,3.65 25.11,3.39 25.11,2.38 24.86,2.12 24.22,2.12 23.33,1.24 20.54,1.24 20.41,1.36 20.41,1.49 20.16,1.74 D5.1 20.03,1.87 17.75,1.87 C4.2 17.62,1.87 13.43,1.87 9.95,5.35 | 27.27,7.84 27.52,7.84 D2.1 | 27.27,7.84 26.76,8.35 26.76,12.03 J3.G4 | 9.95,5.35 8.86,6.44 8.86,8.35 IC2.9 | v16.6,32.48 15.46,33.62 15.21,33.62 TP4.TP | R12.2 19.08,5.63 v19.08,4.74 19.08,4.72 19.78,4.03 20.67,4.03 D3.1 | R12.2 18.89,5.81 17.11,5.81 Q1.2 | v30.06,29.68 30.06,29.05 26.89,25.87 26.89,24.73 25.75,23.59 25.62,23.59 | 25.62,23.59 23.71,23.59 22.32,24.98 22.32,25.24 J3.G2 | J1.12 10.76,16.09 12.03,16.09 13.43,17.49 14.19,17.49 14.32,17.36 14.57,17.36 15.08,17.87 15.08,19.52 14.44,20.16 10.76,20.16 J1.6 10.76,20.29 10.76,20.92 J1.5 10.63,21.05 9.62,21.05 9.24,21.43 9.24,22.57 10.38,23.71 10.63,23.71 J1.1 10.76,23.84 11.02,24.1 v13.68,24.1 14.19,23.59 15.84,23.59 16.6,24.35 | 18.64,26.88 18.64,26.38 18,25.75 18,23.97 17.62,23.59 17.37,23.59 | 18.64,26.88 v18.64,27.4 | 17.37,23.59 17.36,23.59 16.6,24.35 | 16.6,24.35 16.6,25.24 J3.G1 16.6,25.37 17.27,26.04 v17.27,27.3 | v25.62,20.92 25.62,21.55 | 25.62,21.55 25.62,23.59 | 21.68,21.3 19.02,23.97 18.73,23.97 18.15,23.39 17.57,23.39 17.37,23.59 | 21.68,21.3 24.98,18 25.24,18 25.62,18.38 25.62,19.78 24.99,20.41 24.99,20.93 25.62,21.55
  Bottom 0.127: 21.68,21.3 19.78,19.4 | 19.78,19.4 17.11,16.73 17.11,14.95 16.86,14.7 16.86,11.4 19.78,8.47 19.78,6.57 19.14,5.93 19.14,5.68 R12.2 | J3.G3 12.73,10.28 12,10.28 11.47,9.74 | 11.47,9.74 12.2,9.74 12.21,9.75 12.47,9.49 | 12.47,9.49 | 12.47,9.49 12.8,9.49 v13.05,9.74 | v20.03,27.27 19.86,27.1 18.85,27.1 18.64,26.88 | v11.02,5.68 10.68,5.35 9.95,5.35
  pour Top: 2.78,27.58 3.92,29.24 4.61,30.03 6.37,31.73 8.48,33.27 10.82,34.48 12.98,35.3 15.13,35.78 17.3,36.02 19.8,35.94 22.37,35.47 25.34,34.47 28.23,32.84 30.62,30.88 32.84,28.23 33.74,26.74 28.8,26.76 28.73,21.26 28.68,16.66 28.68,11.97 28.63,9.34 29.9,9.31 31.73,9.31 33.76,9.33 32.77,7.63 31.68,6.3 29.9,4.49 28.49,3.36 26.49,2.13 24.61,1.24 22.33,0.5 19.65,0.07 17,0.02 14.22,0.4 11.61,1.19 9.59,2.08 7.75,3.2 5.78,4.77 4.12,6.55 2.64,8.57 1.6,10.49 0.79,12.57 0.31,14.74 0.04,16.87 0.01,18.91 0.26,21.05 0.71,23.08 1.35,24.85 2.53,27.24 2.78,27.59
  pour Bottom: 3.17,28.2 5.24,30.75 6.33,31.69 8.42,33.25 10.2,34.21 12.2,35.01 14.09,35.56 16.32,35.91 18.17,36 20.19,35.88 22.29,35.5 24.04,34.98 26.09,34.11 28.37,32.74 30.03,31.41 31.48,29.99 32.81,28.3 33.54,27.1 33.73,26.75 33.19,26.7 30.5,26.75 28.8,26.77 28.74,23.36 28.73,20.95 28.74,18.87 28.67,14.93 28.67,12.22 28.65,10.08 28.66,9.27 33.74,9.32 33.3,8.44 32.41,7.21 31.21,5.81 29.94,4.53 28.76,3.57 27.04,2.41 25.4,1.58 23.87,1 21.54,0.34 19.17,0.05 16.69,0.03 13.82,0.47 11.68,1.13 9.04,2.38 6.6,4.06 4.62,5.93 3.19,7.75 1.93,9.83 1.18,11.64 0.61,13.41 0.19,15.35 0.03,17.25 0.02,19.26 0.34,21.49 0.93,23.81 1.79,25.86 2.89,27.8 3.17,28.2
IMU_INT1  (via drill 0.3)
  Top 0.127: v17.87,28.67 18.13,28.92 18.13,31.59 IC3.16 | v17.49,24.1 17.49,24.73 17.36,24.86 IC5.11
  Bottom 0.127: v17.87,28.67 17.87,26 17.75,25.87 17.75,24.35 v17.49,24.1
IMU_INT2  (via drill 0.3)
  Top 0.127: v21.05,24.1 20.29,24.1 18.25,22.06 18.07,22.06 17.62,22.51 17.62,23.59 18.13,24.1 18.13,24.86 IC5.10 | IC3.1 19.27,31.21 19.52,31.21 19.88,30.85 19.88,30.56 20.29,30.15 20.72,30.15 v21,29.87
  Bottom 0.127: v21,29.87 21,26.33 20.79,26.13 20.79,24.35 v21.05,24.1
IN_DRV  (via drill 0.3)
  Top 0.127: v14.32,24.1 13.81,23.59 13.55,23.59 13.43,23.71 12.92,23.71 IC5.16 | v11.01,32.49 12.01,33.49 13.55,33.49 13.68,33.62 IC6.4
  Bottom 0.127: v11.01,32.49 10.39,32.49 7.33,29.43 7.33,29.18 11.02,25.49 13.71,25.49 13.97,25.23 13.97,24.89 14.32,24.54 v14.32,24.1
LEDA  (via drill 0.3)
  Top 0.127: v9.74,22.19 9.49,22.19 8.72,21.42 8.72,21.17 v8.35,20.79
  Bottom 0.127: v8.35,20.79 5.17,20.79 2.12,17.75 2.12,14.95 2.51,14.57 2.76,14.57 3.14,14.95 3.14,15.08 4.16,16.09 4.41,16.09 6.19,14.32 13.43,14.32 14.57,13.17 14.57,10.13 14.32,9.87 14.32,5.68 14.7,5.3 14.7,4.03 R9.1 | v9.74,22.19 10.51,22.19 10.63,22.32 J1.3
LEDK
  Bottom 0.127: J1.2 10.76,22.95 12.03,22.95 15.46,19.52 15.46,13.3 14.82,12.67 14.82,7.33 Q1.3
MISO  (via drill 0.3)
  Top 0.127: 16.22,11.52 16.86,12.16 16.86,12.28 17.24,12.67 22.95,12.67 23.72,13.43 23.72,13.57 23.91,13.77 v24.6,13.77 | 16.22,11.52 15.71,11.01 IC5.33 | v14.06,13.05 14.82,13.05 v15.33,12.54 | 16.22,11.52 v16.09,11.65
  Bottom 0.127: R8.1 25.75,2.89 28.67,5.81 28.67,7.2 28.29,7.59 28.29,7.84 D2.2 28.16,7.97 28.16,8.86 27.65,9.36 27.65,13.17 26.85,13.97 24.81,13.97 | v14.06,13.05 5.55,13.05 4.79,12.28 4.79,10.25 5.05,10 IC2.2 | v15.33,12.54 16.09,11.78 v16.09,11.65 | v24.6,13.77 24.81,13.97 | J3.P7 24.95,14.11 24.81,13.97
MOSI  (via drill 0.3)
  Top 0.127: 13.94,9.97 13.94,9.24 v13.81,9.11 | 13.94,9.97 13.94,10.89 IC5.31 | v13.81,18.63 14.32,18.63 14.95,18 v14.95,16.86 | v17.36,12.16 16.98,11.78 16.98,10.38 16.76,10.15 14.12,10.15 13.94,9.97 | v14.99,15.93 17.36,13.55 v17.36,13.34
  Bottom 0.127: D3.2 20.79,4.66 22.83,6.7 22.83,7.59 R6.1 22.83,7.71 22.02,7.71 17.93,11.8 17.93,11.88 17.36,12.44 | v13.81,9.11 13.81,8.86 13.17,8.22 IC2.5 | v13.81,18.63 12.67,17.49 10.76,17.49 J1.10 | J3.P3 20.54,14.82 19.65,13.94 18.13,13.94 17.87,13.68 17.61,13.68 17.38,13.91 17.36,13.89 v17.36,13.34 17.36,12.44 | 17.36,12.44 v17.36,12.16 | v14.95,16.86 14.99,16.82 v14.99,15.93
N$1
  Top 0.127: R2-USB.2 20.92,8.41 20.28,9.05 19.43,9.05 19.31,8.94 19.31,7.88 19.65,7.54 19.65,7.01 J2.B5
N$2
  Top 0.127: 21.05,30.95 20.79,30.95 R7-ESP1.2 21.05,30.95 | 21.05,30.95 23.08,32.99 R6_ESP1.1 | 21.05,30.95 21.43,30.57 21.43,29.81 23.08,28.16 23.08,27.99 SJ2.2
N$3  (via drill 0.3)
  Top 0.127: 2.63,14.32 3.14,14.82 3.78,14.82 4.41,14.19 IC4.1 | IC4.3 2.51,14.19 2.63,14.32 | 7.71,17.36 7.71,18.63 v7.59,18.76 | 7.71,17.36 T1.2 | C1_BAT1.1 10.76,20.92 10,20.92 9.11,20.03 D1.1 9.01,19.22 8.32,18.54 8.32,17.8 7.88,17.36 7.71,17.36 | v2.63,15.08 2.63,14.32
  Bottom 0.127: v2.63,15.08 2.63,17.87 4.54,19.78 6.57,19.78 v7.59,18.76
N$4
  Top 0.127: R1-USB.1 16.75,8.28 J2.A5
N$5
  Top 0.127: R6_ESP1.2 24.35,32.99 24.35,30.7 24.1,30.45 SJ1.1
N$7  (via drill 0.3)
  Top 0.127: v19.52,27.78 19.52,26.38 C2.1 | IC6.1 14.44,32.46 15.73,32.46 v16.09,32.1
  Bottom 0.127: v19.52,27.78 17.36,29.94 16.86,29.94 16.09,30.7 v16.09,32.1
N$8
  Top 0.127: R1_BAT.1 14.82,29.68 14.06,29.68 13.81,29.94 11.27,29.94 9.87,28.54 9.87,27.91 MCP73831.1
N$13
  Top 0.127: R2_BAT.2 12.67,28.92 12.67,28.16 MCP73831.5
N$18
  Top 0.127: LED1.C 14.14,27.73 14.82,28.41 R1_BAT.2
PIN_LED  (via drill 0.3)
  Top 0.127: v15.97,12.79 15.97,12.54 15.46,12.03 13.05,12.03 IC5.30
  Bottom 0.127: R11.2 R11.1 | R12.1 19.02,6.95 17.87,6.95 17.11,7.71 Q1.1 16.98,7.84 16.98,9.24 R11.2 | v15.97,12.79 15.97,12.41 16.6,11.78 16.6,9.62 R11.2
PPG_INT  (via drill 0.3)
  Top 0.127: v18.25,12.16 18.25,11.01 IC5.36 | v16.6,15.08 v18.25,13.43 | v21.05,21.3 22.83,21.3 v25.62,24.1
  Bottom 0.127: v18.25,13.43 v18.25,12.16 | v16.6,15.08 16.6,15.46 16.86,15.71 16.86,17.11 v21.05,21.3 | v25.62,24.1 26.64,25.11 26.64,29.05 25.24,30.45 24.98,30.45 24.6,30.06 22.95,30.06 21.94,31.08 TP8.TP
RESET  (via drill 0.3)
  Top 0.127: v28.16,7.08 29.18,8.09 30.06,8.09 RESET_BUTTON.3BUTTON | v26.13,16.86 26.13,11.14 26,11.01 IC5.45 26,10.89 26,7.71 26.26,7.46 R1-ESP.1 25.93,7.06 25.93,6.73 26.53,6.73 26.65,6.61 | v27.02,6.95 26.76,6.95 26.65,6.83 26.65,6.61 | C5.1 25.85,5.12 25.85,5.29 26.1,5.54 RESET_BUTTON.4BUTTON 27.49,5.76 26.65,6.61
  Bottom 0.127: v28.16,7.08 27.14,7.08 v27.02,6.95 | v26.13,16.86 27.14,17.87 27.14,25.75 30.57,29.18 30.57,29.81 29.18,31.21 24.1,31.21 TP9.TP
RX  (via drill 0.3)
  Top 0.127: v25.11,18.51 25.11,13.68 24.73,13.3 23.97,13.3 21.68,11.01 IC5.40
  Bottom 0.127: v25.11,18.51 20.54,23.08 20.54,29.94 19.78,30.7 19.78,31.21 TP11.TP
SCK  (via drill 0.3)
  Top 0.127: 14.82,11.01 14.32,11.52 14.27,11.48 13.72,11.48 13.61,11.37 13.61,9.67 13.57,9.64 v13.05,9.11 | 16.48,12.92 v14.82,14.57 | 16.48,12.92 16.48,12.67 15.58,11.77 15.04,11.77 14.82,11.55 14.82,11.01 | 14.82,11.01 IC5.32 | 16.48,12.92 20.92,12.92 21.81,13.81 22.24,13.81 22.34,13.71 22.78,13.71 v22.86,13.79
  Bottom 0.127: R5.1 25.62,4.54 25.62,5.81 D4.2 25.62,5.93 25.62,11.52 22.83,14.32 22.83,14.82 J3.P5 22.86,14.84 v22.86,13.79 | v13.05,9.11 12.41,8.47 12.41,7.08 IC2.6 | v14.82,14.57 8.6,14.57 4.28,18.89 4.28,19.14 4.66,19.52 4.92,19.52 6.19,18.25 10.63,18.25 J1.9
SCL  (via drill 0.3)
  Top 0.127: IC5.13 15.59,24.86 16.22,24.22 16.73,24.22 16.86,24.35 16.86,25.37 17.11,25.62 18.25,25.62 18.51,25.87 18.51,26.89 18.13,27.27 18.13,27.78 IC3.8 18.13,27.91 18.38,28.16 18.38,31.33 18.76,31.72 19.52,31.72 19.65,31.59 21.18,31.59 21.43,31.84 21.43,32.73 21.18,32.99 18.76,32.99 | 18.76,32.99 14.82,32.99 14.7,32.86 14.19,32.86 IC6.2 | 18.76,32.99 v18.76,34.51
  Bottom 0.127: v18.76,34.51 19.65,33.62 TP6.TP
SDA  (via drill 0.3)
  Top 0.127: IC5.12 16.48,24.98 16.48,25.37 16.86,25.75 16.86,28.29 IC3.9 16.73,28.29 v15.71,28.29 | IC6.3 13.94,33.24 13.55,33.24 13.05,32.73 12.82,32.73 12.47,33.08 12.25,33.08 v11.9,32.73
  Bottom 0.127: v15.71,28.29 12.54,31.46 TP7.TP 11.9,32.14 v11.9,32.73
SS_FLASH  (via drill 0.3)
  Top 0.127: v21.68,20.67 18.38,20.67 16.98,22.06 12.92,22.06 IC5.18 | v26.64,3.14 24.86,3.14 23.71,4.28 21.3,4.28 v19.52,2.51 | v11.9,4.03 v9.11,4.03
  Bottom 0.127: v21.68,20.67 26.38,15.97 26.51,15.97 28.29,14.19 28.29,9.11 28.92,8.47 28.92,5.43 v26.64,3.14 | v19.52,2.51 15.71,2.51 15.33,2.12 13.81,2.12 v11.9,4.03 | v9.11,4.03 8.22,4.92 8.09,4.92 4.54,8.47 4.54,8.73 IC2.1
SS_SD  (via drill 0.3)
  Top 0.127: v20.92,2.63 20.92,3.14 v21.56,3.78 | v19.14,13.43 19.14,13.68 v17.62,15.21 16.75,16.08 16.44,16.08 v16.07,15.71 | v18.14,22.86 18.14,22.88 18.53,23.27 19.07,23.27 20.71,24.91 IC5.7
  Bottom 0.127: v20.92,2.63 20.92,1.87 D5.2 | v21.56,3.78 22.06,3.78 22.32,4.03 R4.1 22.45,4.16 22.45,5.93 23.46,6.95 23.46,9.11 v19.14,13.43 | v18.14,22.86 18.14,18.78 16.07,16.71 v16.07,15.71 | v17.62,15.21 17.62,15.71 17.87,15.97 18.89,15.97 19.4,15.46 J3.P2
SS_TFT  (via drill 0.3)
  Top 0.127: v13.68,19.27 13.43,19.52 12.92,19.52 IC5.21
  Bottom 0.127: v13.68,19.27 11.52,19.27 11.14,18.89 10.76,18.89 J1.8
TFT_DC  (via drill 0.3)
  Top 0.127: IC5.22 12.92,18.63 13.17,18.63 13.94,17.87 v14.48,17.87
  Bottom 0.127: J1.7 10.76,19.65 10.89,19.78 14.44,19.78 14.82,19.4 14.82,18.22 v14.48,17.87
TX  (via drill 0.3)
  Top 0.127: v21.05,12.16 20.92,12.03 20.92,11.01 IC5.39 | v21.05,13.68 21.05,14.19 23.84,16.98 v23.84,20.41 | v25.11,29.94 25.11,33.49 24.1,34.51 v22.83,34.51
  Bottom 0.127: v21.05,13.68 v21.05,12.16 | v23.84,20.41 23.84,21.94 21.05,24.73 21.05,26 24.98,29.94 v25.11,29.94 | v22.83,34.51 21.94,33.62 TP12.TP
VBAT  (via drill 0.3)
  Top 0.127: v10.13,33.39 10.13,33.37 10.19,33.43
  Top 0.3: T1.3 6.64,19.85 9.61,22.82 9.61,24.34 | 9.61,24.34 C2_BAT.1 | 9.61,24.34 9.61,25.74 MCP73831.3 9.59,26.25 v8.86,26.25 | SJ1.2 22.54,30.97 23.74,32.17 23.74,33.67 23.41,34 20.3,34 20.16,34 v19.14,35.02 14.53,35.02 14.39,34.88 13.17,34.88 12.79,34.5 12.01,34.5 11.88,34.37 11.63,34.37 11.41,34.15 11.12,34.15 10.86,34.06 10.77,34.01 10.19,33.43
  Bottom 0.3: TP5.TP 17.62,34.12 18.51,35.02 v19.14,35.02 | v10.13,33.39 6.59,29.85 6.59,28.52 v8.86,26.25
VBUS
  Top 0.3: PFMF.050.1.2 6.86,13.3 | 6.86,13.3 6.86,14.34 C5_USB.1 9.7,15.76 C4_USB.1 9.01,16.58 D1.2 9.01,18.13 9.36,18.49 10.11,18.49 10.81,17.79 R1_PWRUSB.2 12.04,18.59 12.04,25.57 MCP73831.4 12.54,26.07 LED1.A 14.16,26.38 C1_BAT.1 | D6.5 3.15,17.84 5.15,17.84 T1.1 5.69,15.99 5.08,15.38 5.08,15.08 6.86,13.3
VIBE_OUT+  (via drill 0.3)
  Top 0.3: v15.78,29.74 15.78,30.02 15.23,30.57 12.39,30.57 11.54,31.43 10.4,31.43 10.18,31.21 IC6.9
  Bottom 0.3: TP1.TP 15.78,30.44 v15.78,29.74
VIBE_OUT-  (via drill 0.3)
  Top 0.127: 9.88,32.22 9.74,32.22 IC6.7
  Top 0.3: v10.88,33.18 v10.88,33.17 10.65,32.94 10.52,32.94 10.52,32.62 10.17,32.27 9.93,32.27 9.88,32.22
  Bottom 0.127: 12.54,34.13 12.79,33.87 TP2.TP
  Bottom 0.3: v10.88,33.18 10.65,33.41 10.65,33.76 10.95,34.06 12.47,34.06 12.54,34.13
VUSB
  Top 0.127: J2.A4 15.46,6.95 15.71,6.95 J2.B9 | 20.21,6.87 J2.B4 20.29,6.95 20.54,6.95 J2.A9
  Top 0.3: PFMF.050.1.1 11.54,12.44 11.54,9.04 12,8.58 14.83,8.58 15.75,7.66 J2.B9 15.75,6.06 16.22,5.59 19.88,5.59 20.21,5.93 20.21,6.87